# Altium PCB IMU-F03.PcbDoc
Units mil, origin at the board's own origin, x right, y up, seen from the top; angles counter-clockwise.
Board outline 590.55 x 787.4 mil, 4 copper layers (Top Layer, GND02, PWR03, Bottom Layer), stack 23.756 mil thick; 31 components, 22 nets, 141 pads, 17 vias.
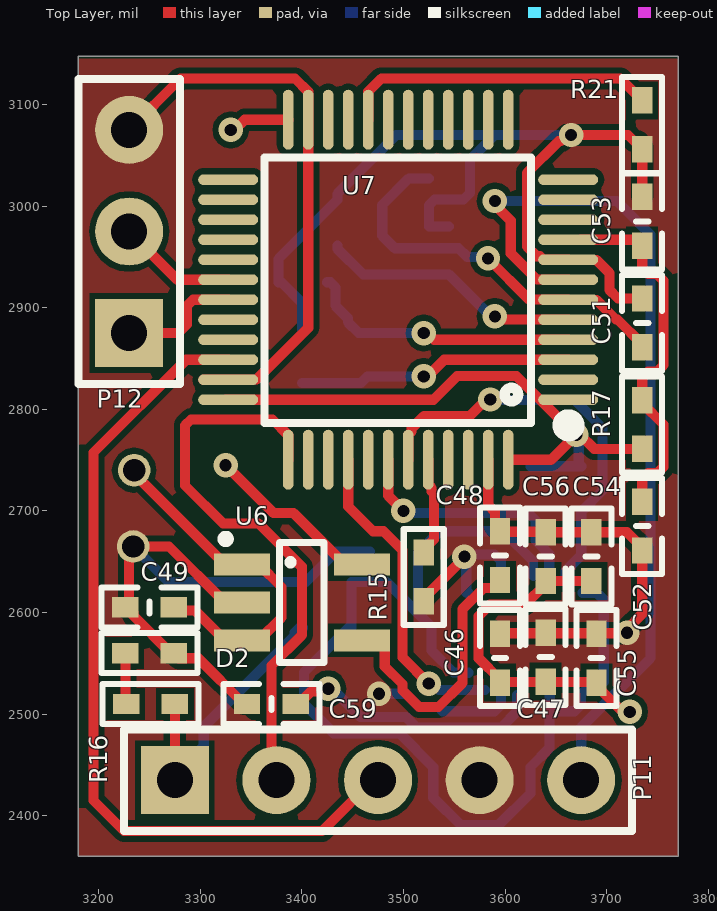
[diagram p0: Top Layer view]
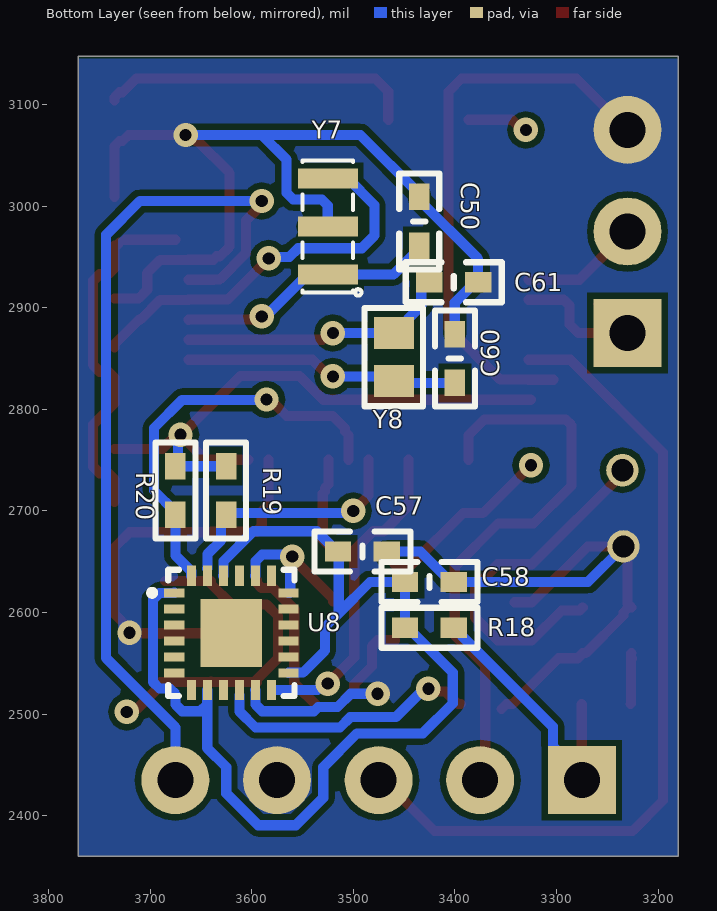
[diagram p1: Bottom Layer view, seen from below]
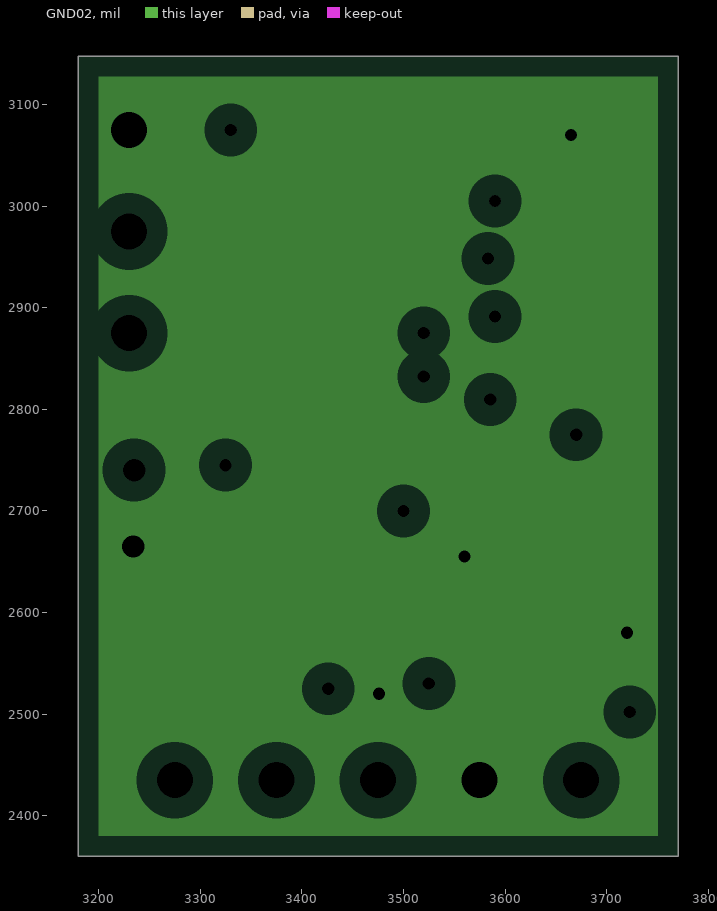
[diagram p2: GND02, clearances drawn from the general rule]
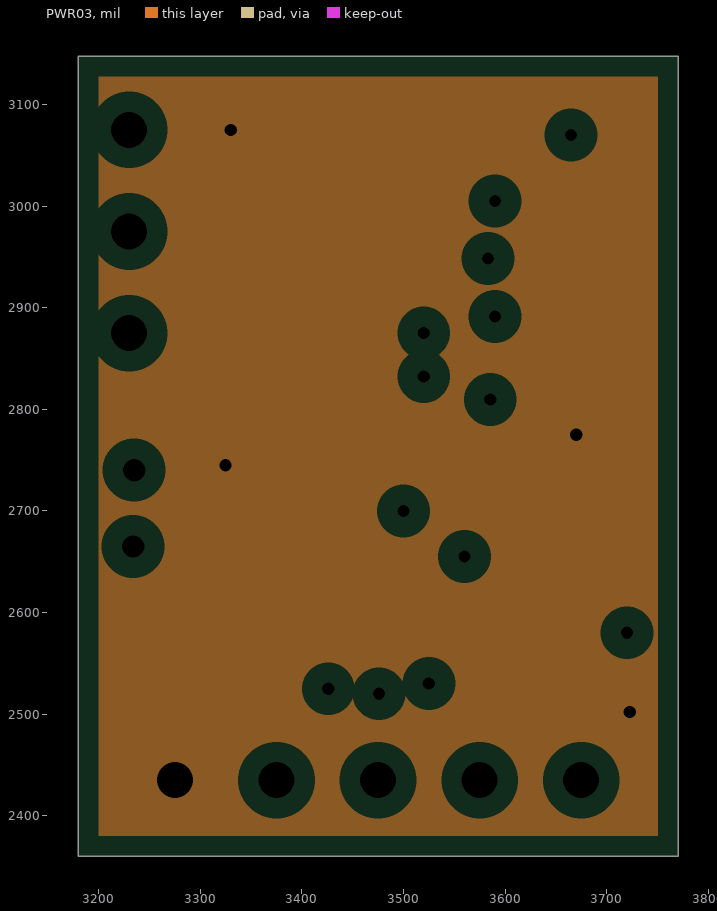
[diagram p3: PWR03, clearances drawn from the general rule]

## Layer stack, top to bottom
Top Solder: solder mask 0.4, Solder Resist, Dk 3.5
Top Layer: signal copper 1.4
Dielectric 2: prepreg 2.8, PP-006, Dk 4.1
GND02: plane copper 1.378, net GND
Dielectric 1: dielectric 12.6, FR-4, Dk 4.8
PWR03: plane copper 1.378, net VCC3.3
Dielectric 3: prepreg 2.8, PP-006, Dk 4.1
Bottom Layer: signal copper 1.4
Bottom Solder: solder mask 0.4, Solder Resist, Dk 3.5

## Board outline
3180,2360 3180,3147.4 3770.55,3147.4 3770.55,2360

## Design rules (kind name [scope] priority, off if disabled: settings)
Clearance [All] p1: gap=6 ignorepadtopadclearanceinfootprint=TRUE
MinimumSolderMaskSliver [All] p1: minsoldermaskwidth=0
PlaneClearance [All] p1: clearance=20
PlaneConnect [All] p1: planeconnectstyle=Relief reliefexpansion=20 reliefentries=4 reliefconductorwidth=10 reliefairgap=10
PolygonConnect [All] p1: connectstyle=Direct reliefconductorwidth=10 reliefentries=4 polygonreliefangle="90 Angle" airgapwidth=10
RoutingVias [All] p1: holewidth=12 width=24 viastyle="Through Hole" minholewidth=1 minwidth=12 maxholewidth=13 maxwidth=27
SilkToSilkClearance [All] p1: silktosilkclearance=0
SilkToSolderMaskClearance [IsPad] p1: minsilkscreentomaskgap=0 clearancetoexposedcopper=TRUE
SolderMaskExpansion [All] p1: expansion=2 istentingtop=FALSE
Width [All] p1: maxlimit=10 minlimit=10 preferedwidth=10
25 further rules are at their usual default settings.

## Components (designator, comment, footprint, x,y, rotation, side; value= is the part's Value field where it differs from the comment)
C46 "0.1uF" "C 0402_M" 3595,2555 r90 top value=100pF
C47 "10uF" "C 0402_M" 3640,2556 r90 top value=100pF
C48 "10nF" "C 0402_M" 3595,2656 r90 top value=100pF
C49 "0.1uF" "C 0402_M" 3250,2605 r180 top value=100pF
C50 "22pF" "C 0402_M" 3435,2985 r90 bottom value=100pF
C51 "22pF" "C 0402_M" 3735,2885 r90 top value=100pF
C52 "10uF" "C 0402_M" 3735,2685 r90 top value=100pF
C53 "0.1uF" "C 0402_M" 3735,2985 r270 top value=100pF
C54 "0.1uF" "C 0402_M" 3685,2655 r90 top value=100pF
C55 "0.1uF" "C 0402_M" 3690,2555 r90 top value=100pF
C56 "0.1uF" "C 0402_M" 3640,2655 r90 top value=100pF
C57 "0.1uF" "C 0402_M" 3491,2660 r180 bottom value=100pF
C58 "10nF" "C 0402_M" 3425,2630 r0 bottom value=100pF
C59 "0.1uF" "C 0402_M" 3370,2510 r0 top value=100pF
C60 "8pF" "C 0402_M" 3400,2850 r90 bottom value=100pF
C61 "8pF" "C 0402_M" 3401,2925 r180 bottom value=100pF
D2 "LED0" "R 0402_M" 3250,2560 r0 top
P11 "SWD" HDR2.54-M-LI-5P 3475,2435 r0 top
P12 "USART1" HDR2.54-M-LI-3P 3230,2975 r90 top
R15 "100K" "R 0402_M" 3520,2635 r90 top value=1K
R16 "1K" "R 0402_M" 3251,2510 r0 top
R17 "10R" "R 0402_M" 3735,2785 r90 top value=1K
R18 "10R" "R 0402_M" 3425,2585 r0 bottom value=1K
R19 "4.7K" "R 0402_M" 3625,2720 r90 bottom value=1K
R20 "4.7K" "R 0402_M" 3675,2720 r270 bottom value=1K
R21 "100K" "R 0402_M" 3735,3080 r270 top value=1K
U6 "LP2992" SOT23-5M 3400,2610 r270 top
U7 "STM32F103CBT6" LQFP48 3497.52,2915.95 r90 top (schematic designator U?)
U8 "MPU9250" "QFN24 3*3" 3620,2580 r270 bottom
Y7 "8MHz" "SMD 3213-3P" 3525,2980 r90 bottom
Y8 "32.768K" SMD1610-2P 3460,2827.76 r90 bottom

## Footprints (in the part's own frame and the unit in brackets; to place one, negate y for a bottom-side part, rotate by r counter-clockwise, add the part's x,y. Pads: shape width x height; smd on the part's side, far side on the other; paste and mask are expansions set on the pad)
"C 0402_M" [mil] "无极性贴片电容                                  淘宝ID:黄晶宝石"
  rect 26x20 smd: 1(-24,0) 2(24,0)
  silkscreen extent -47,-20 47,20, body extent -20,-10 20,10, height 21
HDR2.54-M-LI-3P [mm] "排母，3脚   淘宝ID:黄晶宝石   店铺网址:https://shop463601444.taobao.com"
  rect 1.7x1.7 hole 0.9: 1(-2.54,0)
  round 1.7 hole 0.9: 2(0,0) 3(2.54,0)
  silkscreen extent -3.81,-1.27 3.81,1.27, body extent -3.81,-1.27 3.81,1.27, height 8.5
HDR2.54-M-LI-5P [mm] "排母，5脚   淘宝ID:黄晶宝石   店铺网址:https://shop463601444.taobao.com"
  rect 1.7x1.7 hole 0.9: 1(-5.08,0)
  round 1.7 hole 0.9: 2(-2.54,0) 3(0,0) 4(2.54,0) 5(5.08,0)
  silkscreen extent -6.35,-1.27 6.35,1.27, body extent -6.35,-1.27 6.35,1.27, height 8.5
LQFP48 [mm]
  oval 0.27x1.5 smd: 1(-2.706,-4.182) 2(-2.206,-4.182) 3(-1.706,-4.182) 4(-1.206,-4.182) 5(-0.706,-4.182) 6(-0.206,-4.182) 7(0.294,-4.182) 8(0.794,-4.182) 9(1.294,-4.182) 10(1.794,-4.182) 11(2.294,-4.182) 12(2.794,-4.182) 25(2.794,4.318) 26(2.294,4.318) 27(1.794,4.318) 28(1.294,4.318) 29(0.794,4.318) 30(0.294,4.318) 31(-0.206,4.318) 32(-0.706,4.318) 33(-1.206,4.318) 34(-1.706,4.318) 35(-2.206,4.318) 36(-2.706,4.318)
  oval 1.5x0.27 smd: 13(4.294,-2.682) 14(4.294,-2.182) 15(4.294,-1.682) 16(4.294,-1.182) 17(4.294,-0.682) 18(4.294,-0.182) 19(4.294,0.318) 20(4.294,0.818) 21(4.294,1.318) 22(4.294,1.818) 23(4.294,2.318) 24(4.294,2.818) 37(-4.206,2.818) 38(-4.206,2.318) 39(-4.206,1.818) 40(-4.206,1.318) 41(-4.206,0.818) 42(-4.206,0.318) 43(-4.206,-0.182) 44(-4.206,-0.682) 45(-4.206,-1.182) 46(-4.206,-1.682) 47(-4.206,-2.182) 48(-4.206,-2.682)
  silkscreen extent -3.54,-4.39 3.35,3.41
"QFN24 3*3" [mm]
  rect 0.224x0.505 smd: 1(-1,-1.428) 2(-0.6,-1.428) 3(-0.2,-1.428) 4(0.2,-1.428) 5(0.6,-1.428) 6(1,-1.428) 13(1,1.428) 14(0.6,1.428) 15(0.2,1.428) 16(-0.2,1.428) 17(-0.6,1.428) 18(-1,1.428)
  rect 0.505x0.224 smd: 7(1.428,-1) 8(1.428,-0.6) 9(1.428,-0.2) 10(1.428,0.2) 11(1.428,0.6) 12(1.428,1) 19(-1.428,1) 20(-1.428,0.6) 21(-1.428,0.2) 22(-1.428,-0.2) 23(-1.428,-0.6) 24(-1.428,-1)
  rect 1.7x1.54 smd: 25(0,0)
  silkscreen extent -1.58,-2.05 1.58,1.58
"R 0402_M" [mil] "1/16W贴片电阻       淘宝ID:黄晶宝石"
  rect 26x20 smd: 1(-24,0) 2(24,0)
  silkscreen extent -47,-20 47,20, body extent -20,-10 20,10, height 12
SMD1610-2P [mm]
  rect 0.8x1 smd: 1(0,0) 2(1.2,0)
  silkscreen extent -0.63,-0.73 1.83,0.73
"SMD 3213-3P" [mm]
  rect 0.5x1.5 smd: 1(-1.2,0) 2(0,0) 3(1.2,0)
  silkscreen extent -1.73,-0.84 1.65,0.64, body extent -1.6,-0.75 1.6,0.75, height 0.61
SOT23-5M [mm] "3x1.6x1.1mm(长宽高) 封装库来自淘宝卖家 ID：黄晶宝石"
  rect 0.55x1.4 smd: 1(-0.95,-1.5) 2(0,-1.5) 3(0.95,-1.5) 4(0.95,1.5) 5(-0.95,1.5)
  silkscreen extent -1.66,-1.98 1.5,0.56, body extent -1.5,-1.4 1.5,1.4, height 1.15

## Part data
C46 C47 C48 C49 C50 C51 C52 C53 C54 C55 C56 C57 C58 C59 C60 C61: library part Cap, "Capacitor", LatestRevisionDate=17-Jul-2002, LatestRevisionNote="Re-released for DXP Platform.", PackageDescription="Radial Cap, Thru-Hole; 2 Leads; 0.3 in Pin Spacing", PackageReference=RAD-0.3, Published=8-Jun-2000, Publisher="Altium Limited"
D2: "Typical INFRARED GaAs LED", LatestRevisionDate=08-Jul-2005, LatestRevisionNote="Mech Layer 1 removed.", PackageDescription="LED; 2 Leads", PackageReference=LED-0, Published=8-Jun-2000, Publisher="Altium Limited"
P12: library part USART
R15 R16 R17 R18 R19 R20 R21: library part Res2, "Resistor", LatestRevisionDate=17-Jul-2002, LatestRevisionNote="Re-released for DXP Platform.", PackageDescription="Axial Device, Thru-Hole; 2 Leads; 0.4 in Pin Spacing", PackageReference=AXIAL-0.4, Published=8-Jun-2000, Publisher="Altium Limited"
Y7: library part Y_3Pin
Y8: library part XTAL, "Crystal Oscillator", LatestRevisionDate=17-Jul-2002, LatestRevisionNote="Re-released for DXP Platform.", PackageDescription="Crystal, Thru-Hole; 2 Leads; Body 3.1 x 8.2 mm (Dia.xH)", PackageReference=R38, Published=8-Jun-2000, Publisher="Altium Limited"

## Free pads (board coordinates)
  round 32 hole 22: 13(3235,2740) 14(3234,2665)

## Via types
v1: diameter 24, hole 12, Top Layer to Bottom Layer, 17 vias

## Nets (pads, with @x,y where several pads share a name; then routed paths per layer and width w, separated by ;. In a path a pad name is that pad's centre, name@x,y a point inside that pad or via, vN(x,y) a via of type N, cw(c..) or ccw(c..) an arc to the next point about the centre after c; other vN are vias at no path point)
GND: C46.2 C47.2 C48.2 C49.2 C50.2 C51.2 C52.1 C53.1 C54.2 C55.2 C56.2 C57.2 C58.1 C59.1 C60.2 C61.2 D2.2 P11.4 P12.3 pad.14 R15.1 R21.2 U6.2 U7.8 U7.23 U7.35 U7.47 U8.11 U8.18 U8.20 Y7.2 | length 2907.4
  Top Layer w10: P12.3 3280.52,3125.52 3393.33,3125.52 3406.26,3112.59 U7.23 3406.26,2880.23 3355.25,2829.22 3327.64,2829.22 U7.35 U7.35@3303.14,2829.1 ; U6.2 3324.21,2610 3269.21,2665 pad.14 3230,2661 3230,2609 C49.2 3229,2605 3234,2600 3234,2597 3271,2560 D2.2 3279,2555 3298,2555 3343,2510 C59.1 3349,2510 C59.1@3354,2505 ; R15.1 3520,2614 3560,2654 v1(3560,2655) ; U7.47 3583.41,2705.83 3590,2699.24 3590,2685 C48.2 3595.5,2679.5 3639.5,2679.5 C56.2 C54.2 3720,2679 3735,2664 C52.1 3735,2598.65 3720.14,2583.79 v1(3720.14,2580) v1@3720,2580.14 ; C46.2 3595.5,2579.5 3639.5,2579.5 C47.2 3640.5,2579.5 3689.5,2579.5 C55.2 3690.5,2579.5 3714.28,2579.5 3717.46,2582.68 v1@3720,2580.14 ; v1@3720,2580 v1@3720,2580.14 ; v1@3720,2583.79 v1@3720,2580.14 ; C51.2 3711.21,2909 3702.68,2917.53 3702.68,2934.27 3689.86,2947.09 3662.27,2947.09 U7.8 3637.77,2947.21 3634.41,2950.57 3631.18,2950.57 3621.63,2960.13 3621.63,3032.71 3652.87,3063.95 3655.16,3063.95 3661.21,3070 v1(3665,3070) 3721,3070 3727,3064 3730,3064 3735,3059 R21.2 C53.1
  Bottom Layer w10: pad.14 3269,2630 C58.1 3404,2630 3434,2660 C57.2 ; C60.2 3400,2905 3380,2925 C61.2 3377,2948 3435,3006 C50.2 3435,3012 3493,3070 3590,3070 ; C57.2@3466.5,2654.5 C57.2@3467,2655 ; v1@3475,2520 v1(3476,2520) 3502.47,2520 3515.47,2507 3534.53,2507 3538.67,2502.86 3589.6,2502.86 3596.04,2509.3 3596.04,2523.46 U8.11 ; Y7.2@3544.68,2980 Y7.2 3525,3000.54 3530.86,3006.4 3559.08,3006.4 3565.53,3012.85 3565.53,3045.53 3590,3070 ; U8.18 3562.49,2619.37 3561.9,2619.96 3561.9,2653.1 v1(3560,2655) 3562.14,2657.14 3589.6,2657.14 3596.04,2650.7 3596.04,2636.54 U8.20 ; v1(3665,3070) 3590,3070
IIC_SCL: R19.1 U7.42 U8.23 | length 243.6
  Top Layer w10: U7.42 3485,2715 v1(3500,2700)
  Bottom Layer w10: v1(3500,2700) 3502,2698 3623,2698 R19.1 3630,2691 3630,2670.86 3643.54,2657.33 3643.54,2643.47 U8.23@3643.62,2643.38
IIC_SDA: R20.2 U7.43 U8.24 | length 404.2
  Top Layer w10: U7.43 3504.67,2774.74 3508.05,2778.11 3508.05,2781.33 3520.12,2793.41 3565.37,2793.41 3581.59,2809.62 v1(3585.38,2809.62)
  Bottom Layer w10: v1(3585.38,2809.62) 3585.76,2809.24 3668.28,2809.24 3696,2781.53 3696,2720 3675,2699 R20.2 3675,2656.18 3659.37,2640.55 U8.24
INT: U7.40 U8.12 | length 316.9
  Top Layer w10: U7.40 3445.62,2704.38 3470,2680 3480.4,2680 3499,2661.4 3499,2556 v1(3525,2530)
  Bottom Layer w10: v1(3525,2530) 3528.79,2530 3534.99,2523.8 U8.12@3580.04,2523.8
JTCK: P11.2 U7.37 | length 561.4
  Top Layer w10: P11.2@3375,2440 3370,2445 3370,2535 3370.16,2535.16 3370.16,2547.87 3400,2577.71 3400,2645 3357.5,2687.5 3322.5,2687.5 3285,2725 3285,2784.14 3290.86,2790 3371.13,2790 3386.56,2774.57 U7.37
JTMS: P11.3 U7.34 | length 828
  Top Layer w10: U7.34 3286.26,2848.78 3195,2757.51 3195,2415 3225,2385 3420,2385 P11.3@3475,2440
NetC48_1: C48.1 U6.4 | length 274.4
  Top Layer w10: U6.4 3475.79,2572.6 3481.62,2566.77 3481.62,2546.91 3499,2529.53 3499,2523.47 3515.47,2507 3534.53,2507 3558,2530.47 3558,2603.18 3578.82,2624 3590,2624 3595,2629 C48.1
NetC50_1: C50.1 U7.5 Y7.1 | length 259.1
  Top Layer w10: v1(3590,2891.47) 3593.2,2888.27 3662.03,2888.27 U7.5
  Bottom Layer w10: C50.1 3435,2958 3460.24,2932.76 Y7.1 3544.68,2932.76 3585.97,2891.47 v1(3590,2891.47)
NetC51_1: C51.1 U7.6 Y7.3 | length 390
  Top Layer w10: v1(3583.18,2948.47) 3623.7,2907.96 3662.03,2907.96 3662.27,2907.72 3689.86,2907.72 3709.22,2888.36 3710.64,2888.36 3735,2864 C51.1
  Bottom Layer w10: Y7.3 3505.32,3027.24 3479.14,3001.07 3479.14,2970.93 3491.54,2958.53 3554.15,2958.53 3562.68,2950 3581.66,2950 v1(3583.18,2948.47)
NetC52_2: C52.2 C53.2 R17.2 U7.9 | length 407.4
  Top Layer w10: U7.9@3689.88,2966.76 3675.12,2966.76 3675,2966.88 3724.12,2966.88 U7.9@3689.88,2966.88 ; C53.2@3730,2964 C53.2@3735,2959 ; C52.2 3735,2731.14 3740.86,2737 3749.56,2737 3756,2743.44 3756,2785 3735,2806 R17.2 3735,2831.14 3740.86,2837 3749.56,2837 3756,2843.44 3756,2926.56 3749.56,2933 3740.86,2933 3735,2938.86 C53.2@3735,2959 ; C53.2 C53.2@3735,2959
NetC59_2: C59.2 U8.10 | length 261.7
  Top Layer w10: C59.2 3397,2510 3409.32,2522.32 3423.32,2522.32 v1(3426,2525)
  Bottom Layer w10: v1@3425,2520 3435,2520 3458,2497 3502.85,2497 3512.99,2486.86 3596.22,2486.86 3612.04,2502.67 U8.10@3612.04,2518.86
NetC60_1: C60.1 U7.3 Y8.1 | length 271.6
  Top Layer w10: v1(3520,2832.41) 3523.79,2832.41 3540.16,2848.78 U7.3
  Bottom Layer w10: C60.1 3458.24,2826 3464.65,2832.41 v1(3520,2832.41)
NetC61_1: C61.1 U7.4 Y8.2 | length 273.6
  Top Layer w10: v1(3520,2875) 3523.79,2875 3530.32,2868.47 U7.4 U7.4@3662.03,2868.35
  Bottom Layer w10: C61.1 3428,2925 3433,2920 3433,2902 3445.32,2889.68 3445.32,2885.75 3456.06,2875 Y8.2 v1(3520,2875)
NetD2_1: D2.1 R16.1 | length 51.1
  Top Layer w10: D2.1@3225.5,2554.5 D2.1@3226,2555 ; D2.1 3226.5,2559.5 3226.5,2510.5 R16.1
NetR15_2: R15.2 U7.44 | length 97.8
  Top Layer w10: R15.2 3520,2662 3530,2672 3530,2717.11 3527.73,2719.38 3527.73,2722.61 3524.36,2725.98 U7.44
NetR21_1: R21.1 U7.20 | length 313.3
  Top Layer w10: U7.20 3465.43,3085.12 3465.43,3112.72 3478.24,3125.53 3713.47,3125.53 3727,3112 3730,3112 3735,3107 R21.1
RESET: P11.5 U7.7 | length 910.8
  Top Layer w10: v1(3590,3005) 3590,3001.21 3605.63,2985.59 3605.63,2953.5 3631.49,2927.63 U7.7@3662.03,2927.63 ; U7.7@3637.77,2927.51 U7.7 U7.7@3662.03,2927.63 ; U7.7@3637.77,2927.63 U7.7@3662.03,2927.63 ; P11.5 P11.5@3678.46,2431.54
  Bottom Layer w10: v1(3590,3005) 3710,3005 3743.14,2971.86 3743.14,2555.04 3675,2486.89 P11.5
USART_RX: P12.1 U7.31 | length 162.2
  Top Layer w10: P12.1@3258.46,2903.46 P12.1 3278.46,2875 3286.99,2883.53 3286.99,2901.98 3292.85,2907.84 U7.31
USART_TX: P12.2 U7.30 | length 124.4
  Top Layer w10: P12.2 3277.49,2927.51 U7.30 ; P12.2@3248.6,2976.4 P12.2@3248.6,2983.6
VCC3.3: C46.1 C47.1 C54.1 C55.1 C56.1 P11.1 R16.2 R17.1 R18.1 R19.2 R20.1 U6.5 U7.1 U7.24 U7.36 U7.48 | length 1516.3
  Top Layer w10: R16.2 3275,2440 P11.1@3284,2449 ; v1(3325,2745) 3372.22,2697.78 3391.95,2697.78 3442.32,2647.4 U6.5 ; U7.36@3325,2809.11 3325.29,2809.41 U7.36 3529.53,2809.41 3552.74,2832.62 3611.35,2832.62 v1@3668.97,2775 ; v1(3330,3075) 3333.79,3075 3343.78,3084.99 U7.24 ; U7.48 3645.36,2750.36 v1(3670,2775) ; U7.1@3636.25,2807.72 v1@3668.97,2775 ; C54.1 C56.1 3640,2628 3620,2608 3585.44,2608 3574,2596.56 3574,2555 3595,2534 C46.1 3595.5,2531.5 3639.5,2531.5 C47.1 3640.5,2531.5 3689.5,2531.5 C55.1 3690,2528 3713.14,2504.86 3720.14,2504.86 v1(3722.82,2502.18) ; R17.1 3687.79,2761 3673.79,2775 v1(3670,2775) ; v1@3668.97,2775 v1(3670,2775)
  Bottom Layer w10: P11.1@3275,2440 3303.46,2468.46 3303.46,2487.46 3393,2577 3393,2580 3398,2585 R18.1 ; R19.2 R20.1 3672.5,2746.5 3672.5,2772.5 v1(3670,2775)
VCC3.7: C49.1 pad.13 U6.1 U6.3 | length 353.4
  Top Layer w10: pad.13 3235,2736.61 3324.21,2647.4 U6.1 3357.68,2647.4 3380,2625.08 3380,2594.92 3357.68,2572.6 U6.3 3324.21,2572.6 3295.01,2601.8 3277.2,2601.8 C49.1
VDDIO: C57.1 C58.2 R18.2 U8.1 U8.8 U8.13 U8.22 | length 1122
  Bottom Layer w10: U8.13 3563.46,2540.97 3549.3,2540.97 3527.78,2562.49 3527.78,2585.63 3514.21,2599.21 ; U8.22 3627.54,2636.54 3627.54,2650.7 3598.23,2680 3535.72,2680 3523,2667.28 3523,2665 3518,2660 C57.1 3514.21,2659.21 3514.21,2599.21 ; U8.1 3676.54,2619.03 3690.7,2619.03 3697.14,2612.59 3697.14,2531.66 3690.7,2525.22 3680.64,2525.22 3674.78,2519.36 3674.78,2509.3 3668.34,2502.86 3650.4,2502.86 3643.96,2509.3 3643.96,2523.46 U8.8 3643.62,2509.3 3643.62,2466.5 3625,2447.88 3625,2422.12 3593.42,2390.54 3556.58,2390.54 3529.4,2417.72 3529.4,2447.82 3496.22,2481 3431.47,2481 3402,2510.47 3402,2541 3446,2585 R18.2 C58.2 3483.41,2630 3514.21,2599.21
pads on no net: U7.2 U7.10 U7.11 U7.12 U7.13 U7.14 U7.15 U7.16 U7.17 U7.18 U7.19 U7.21 U7.22 U7.25 U7.26 U7.27 U7.28 U7.29 U7.32 U7.33 U7.38 U7.39 U7.41 U7.45 U7.46 U8.2 U8.3 U8.4 U8.5 U8.6 U8.7 U8.9 U8.14 U8.15 U8.16 U8.17 U8.19 U8.21 U8.25

## Polygon pours and split planes (outlines as drawn)
GND on Bottom Layer "GND_L04_P000" (solid, remove dead copper, pour order 0): 3180,3145 3770,3145 3770,2360 3180,2360
GND on Top Layer "GND_L01_P001" (solid, remove dead copper, pour order 1): 3180,3145 3770,3145 3770,2360 3180,2360
GND on GND02 (split plane): 3750.45,2380.1 3200.1,2380.1 3200.1,3127.3 3750.45,3127.3
VCC3.3 on PWR03 (split plane): 3750.45,2380.1 3200.1,2380.1 3200.1,3127.3 3750.45,3127.3

## Silkscreen, mask and mechanical layers (free items; w line width, h text height)
Mechanical 1:
  lines w10: 3180,2360 3180,3147.4 3765,3147.4 3765,2360 3180,2360